# Altium PCB 3043-1-1532.PcbDoc
Units mm, origin at the board's own origin, x right, y up, seen from the top; angles counter-clockwise.
Board outline 82.5 x 82.18 mm, 2 copper layers (Top Layer, Bottom Layer); 98 components, 93 nets, 361 pads, 128 vias.
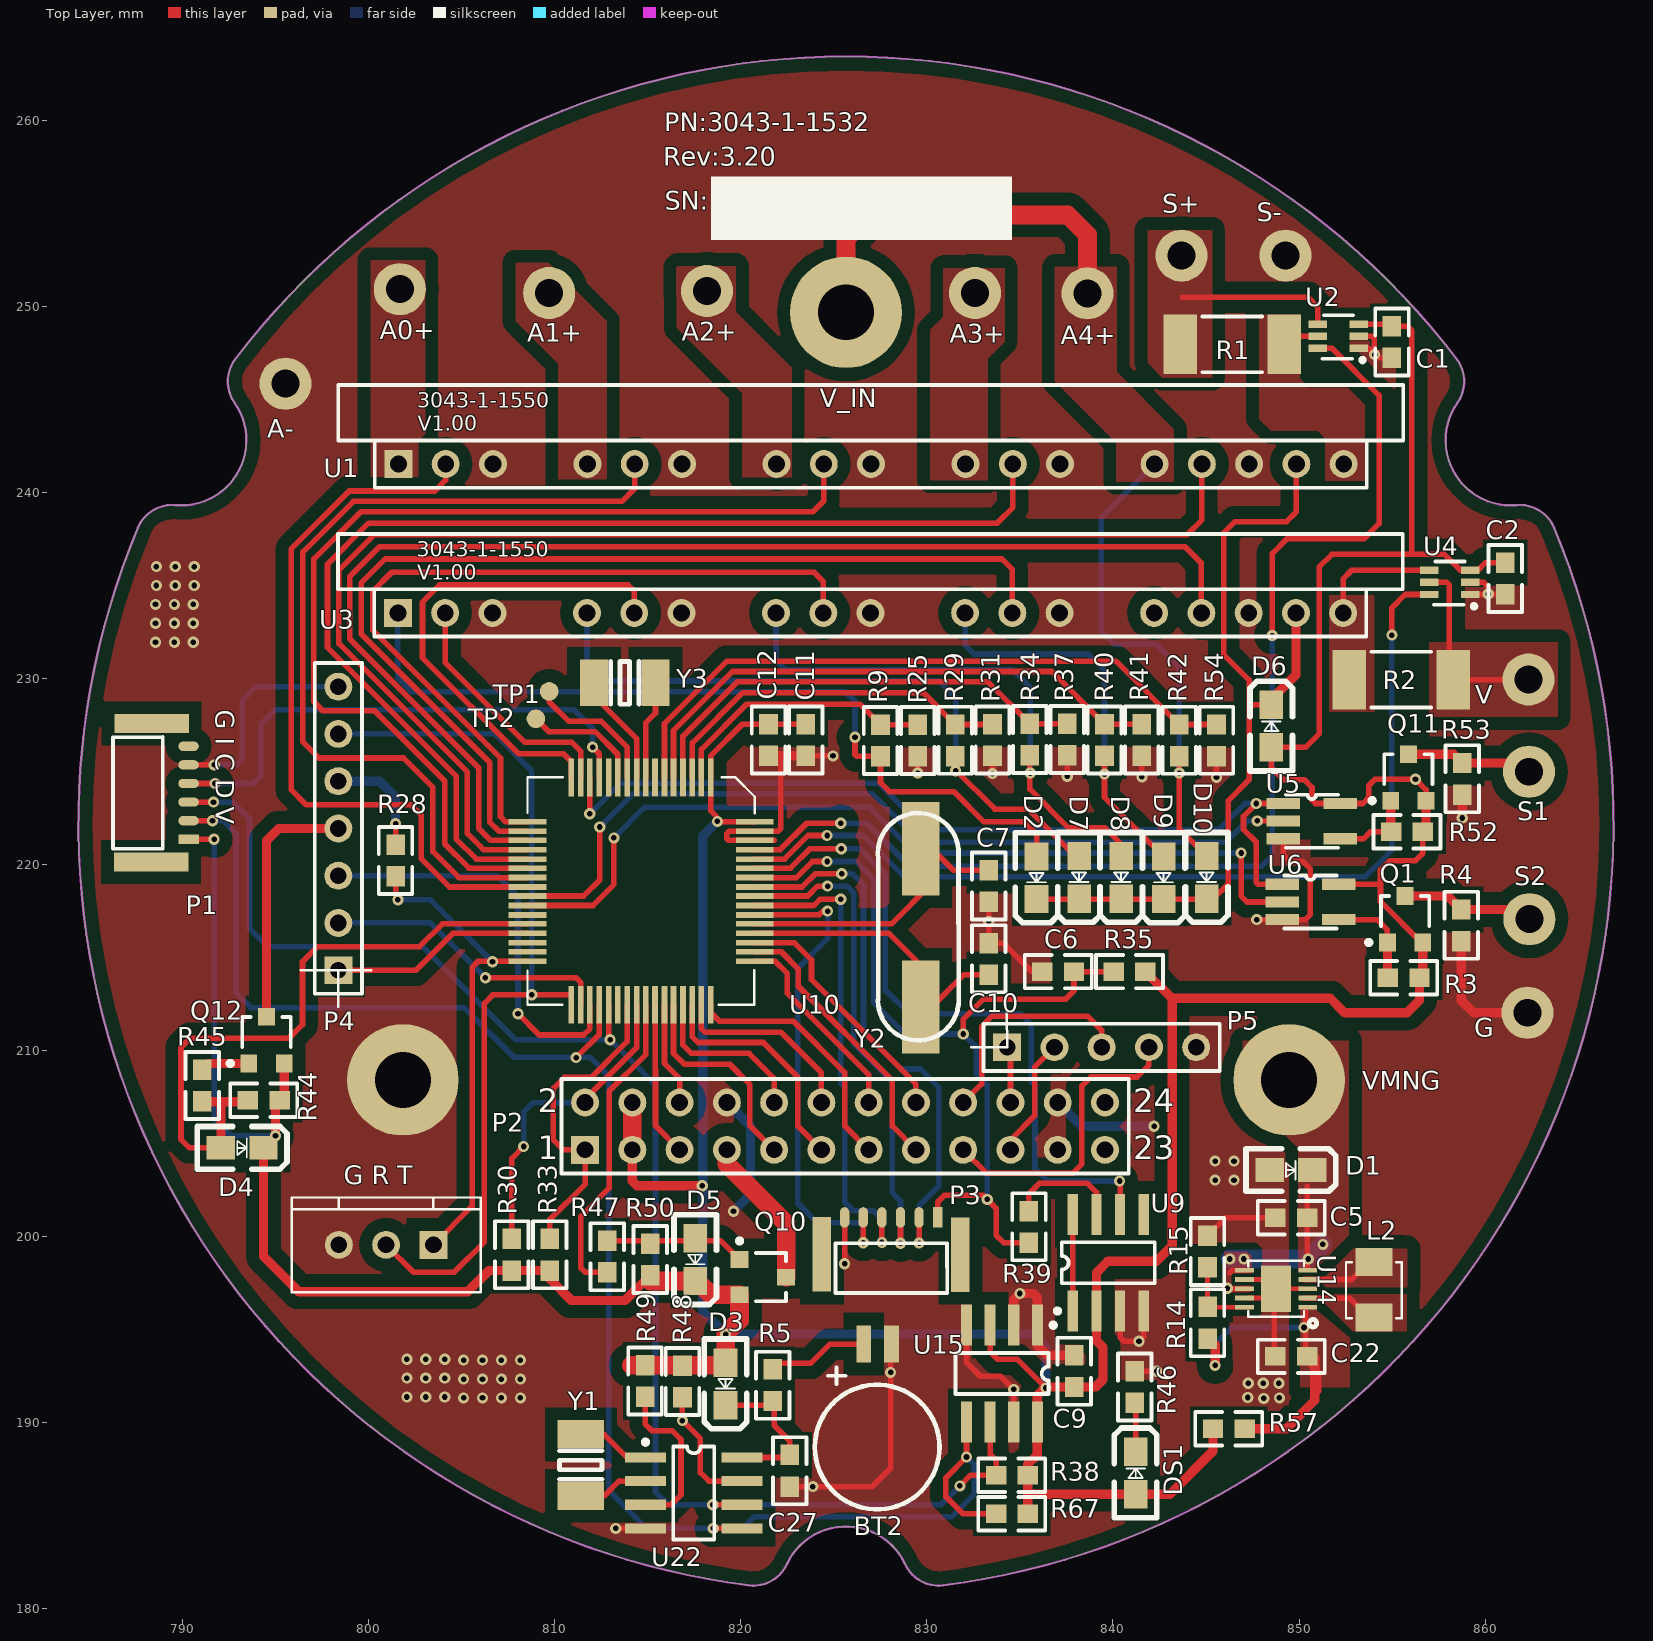
[diagram p0: Top Layer view]
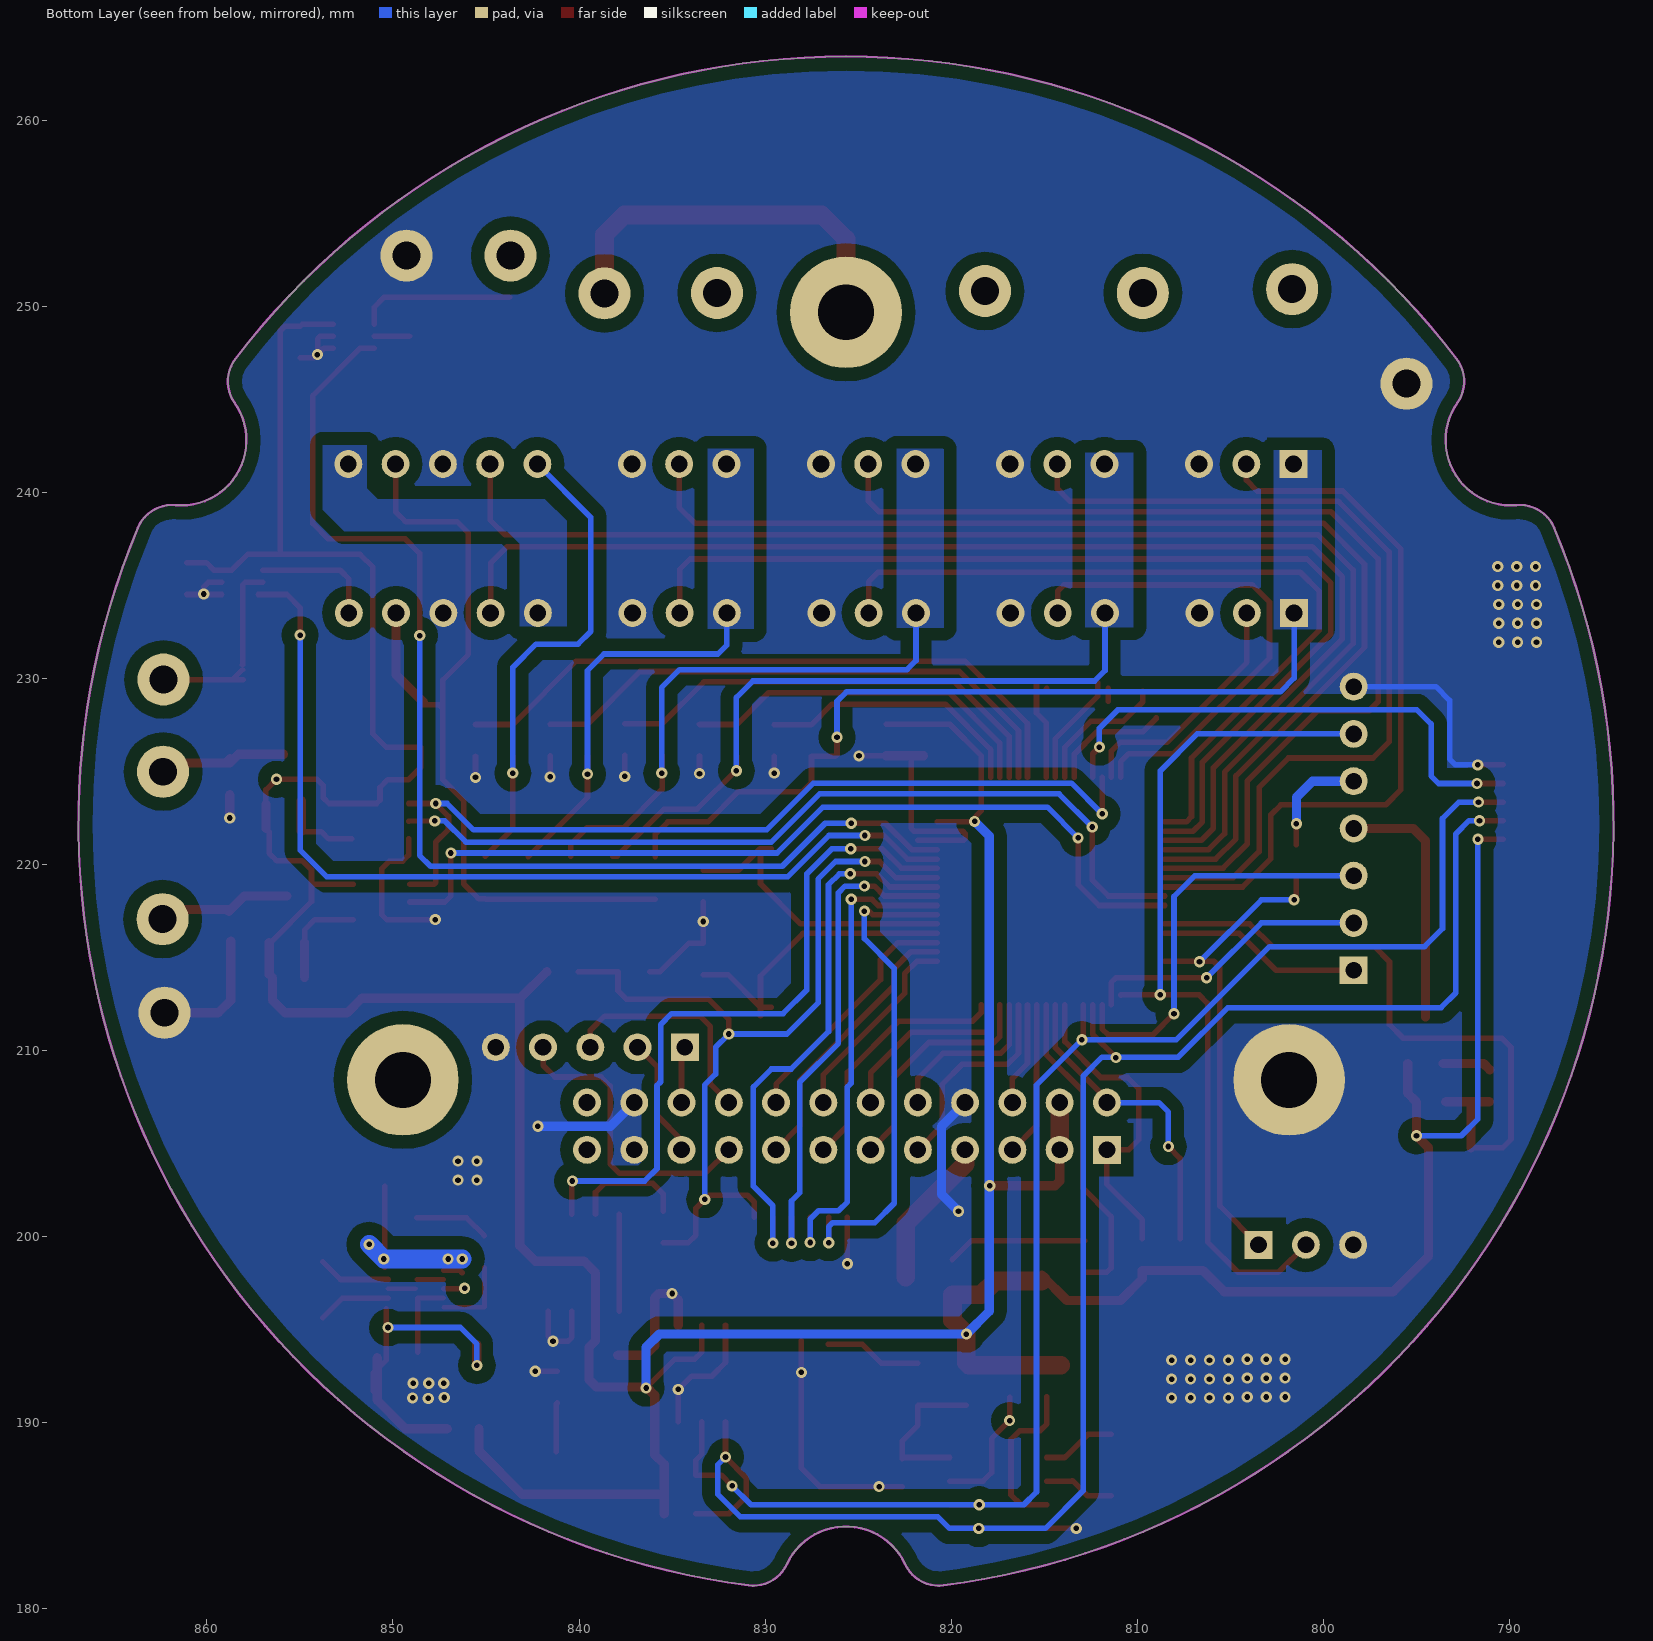
[diagram p1: Bottom Layer view, seen from below]

## Layer stack, top to bottom
Top Layer: signal copper 0.0356
Dielectric: core 0.32, FR-4, Dk 4.8
Bottom Layer: signal copper 0.0356

## Board outline
787.598,238.1 cw(c789.443,237.328) 789.62,239.32 ccw(c789.93,242.806) 792.794,244.818 cw(c794.431,245.967) 792.84,247.179 cw(c825.653,222.181) 858.466,247.179 cw(c856.875,245.967) 858.512,244.818 ccw(c861.377,242.806) 861.686,239.32 cw(c861.863,237.328) 863.708,238.1 cw(c825.653,222.181) 830.895,181.266 cw(c830.641,183.25) 828.827,182.407 ccw(c825.653,180.931) 822.479,182.407 cw(c820.666,183.25) 820.411,181.266 cw(c825.653,222.181)

## Design rules (kind name [scope] priority, off if disabled: settings)
Clearance [All] p1: gap=0.1
ComponentClearance [All] p1: gap=0 collisioncheckmode=2
HoleSize [All] p1: absolutevalues=TRUE maxlimit=10 minlimit=0.025 maxpercent=80.000 minpercent=20.000
PolygonConnect [All] p1: connectstyle=Direct reliefconductorwidth=0.254 reliefentries=4 polygonreliefangle="90 Angle"
RoutingVias [All] p1: holewidth=0.711 width=1.27 viastyle="Through Hole" minholewidth=0.711 minwidth=1.27 maxholewidth=0.711 maxwidth=1.27
SolderMaskExpansion [All] p1: expansion=0.102
TestPointUsage [All] p1: valid=0 allowmultiple=FALSE
Testpoint [All] p1: side=15 testpointundercomponent=TRUE minsize=1.016 maxsize=2.54 preferedsize=1.524 minholesize=0 maxholesize=1.016 preferedholesize=0.813 testpointgrid=0.025 style=1023 order=1234567890
Width [All] p1: maxlimit=10 minlimit=0.1 preferedwidth=0.254 toplayer_prefwidth=0.5 bottomlayer_prefwidth=0.3 minimp=50.000000 maximp=50.000000 favimp=50.000000
16 further rules are at their usual default settings.

## Classes and differential pairs
component class U_7-GPS&GPRS: D4 P4 Q12 R28 R44 R45
component class U_5-ADC: R9 R25 R29 R31 R34 R37 R40 R41 R42 R54
component class U_4-LuxSensor: JP13 MARK1 MARK2 NET P1 PWR Ref1 VR1 VR2
component class U_3-MCU: BT3 BT4 BT5 BT6 BT7 BT8 C6 C7 C10 C11 C12 CN1 CN2 CP1 CP2 CP3 CP4 CP5 CP6 CP7 CP8 D5 DBG G "G R T" JP2 JP3 P2 P3 P5 Q1 Q10 Q11 R3 R4 R30 R33 R35 R39 R47 R50 R52 R53 RA3 RA4 S1 S2 S3 S4 S5 S6 S7 S8 TP1 TP2 TP3 TP7 TP13 TP14 TP15 TP16 TP17 TP18 U5 U6 u7 U9 U10 U29 U30 U31 U57 U58 U59 U60 U61 U62 V Y2 Y3
component class U_1-Power: 5V -5V BAT C5 C22 D1 D6 DS1 J1 J2 J3 J4 L2 NC R14 R15 R46 R57 R58 R94 R95 R96 R97 R98 R99 R100 R101 R102 TP11 U14 U32 U63 U64 U65 U66 U67 U68 U69 VIN VMNG VOUT
component class U_2-Charge&Discharge: A0+ A1+ A2+ A3+ A4+ A- C1 C2 D2 D7 D8 D9 D10 GND Q2 Q3 Q4 Q5 Q6 Q7 Q8 Q9 R1 R2 R6 R7 R10 R11 R12 R13 R16 R17 R18 R19 R20 R21 R22 R23 R27 R32 R36 R70 R71 R72 R73 R74 R75 R76 R77 R78 R87 R88 R89 R90 R91 R92 R93 S+ S- SEN U1 U2 U3 U4 U7 U8 U11 V_IN
component class U_6-E2p&RTC: BT2 C9 C27 D3 DS3 L1 L3 R5 R38 R48 R49 R67 TP4 TP5 U15 U22 Y1

## Components (designator, comment, footprint, x,y, rotation, side; value= is the part's Value field where it differs from the comment)
A0+ "ND" END_1.5_2.8 801.675,250.927 r0 top
A1+ "ND" END_1.5_2.8 809.701,250.723 r0 top
A2+ "ND" END_1.5_2.8 818.185,250.825 r0 top
A3+ "ND" END_1.5_2.8 832.587,250.723 r0 top
A4+ "ND" END_1.5_2.8 838.632,250.698 r0 top
A- "ND" END_1.5_2.8 795.528,245.847 r0 top
BT2 "MS621FE" BATT_BAK 827.278,188.087 r90 top
C1 "100nF_20%_0603" C1608-0603 854.989,248.082 r90 top
C2 "100nF_20%_0603" C1608-0603 861.085,235.382 r90 top
C5 "10uF_20%_0603" C1608-0603 849.581,201.017 r180 top
C6 "100nF_20%_0603" C1608-0603 837.057,214.249 r180 top
C7 "22pF_20%_0603" C1608-0603 833.323,218.846 r90 top
C9 "100nF_20%_0603" C1608-0603 837.921,192.776 r90 top
C10 "22pF_20%_0603" C1608-0603 833.323,214.935 r270 top
C11 "100nF_20%_0603" C1608-0603 823.493,226.695 r270 top
C12 "100nF_20%_0603" C1608-0603 821.487,226.695 r270 top
C22 "4.7uF_20%_0603" C1608-0603 849.579,193.573 r180 top
C27 "Cap2" C1608-0603 822.63,187.427 r270 top
D1 "5.1V" LED0805 849.681,203.581 r180 top (schematic designator D?)
D2 "SS14" LED0805 835.889,219.177 r90 top
D3 "SS14" LED0805 819.175,191.973 r90 top
D4 "5.1V" LED0805 793.318,204.775 r180 top
D5 "5.1V" LED0805 817.55,198.653 r90 top
D6 "SS14" LED0805 848.512,227.559 r270 top
D7 "SS14" LED0805 838.175,219.202 r90 top
D8 "SS14" LED0805 840.435,219.202 r90 top
D9 "SS14" LED0805 842.721,219.177 r90 top
D10 "SS14" LED0805 845.033,219.202 r90 top
DS1 "LED" LED0805 841.223,187.427 r270 top
G "ND" END_1.5_2.8 862.279,212.039 r90 top
"G R T" "Header 3" XH-03H 803.478,199.568 r180 top (schematic designator "T R G")
L2 "Inductor" L3x3x1.5_5A 855.523,198.653 r270 top
P1 "Header 5H" SH-06S 790.296,221.386 r90 top
P2 "Header 12X2" HDR2X12 811.632,204.673 r0 top locked
P3 "Header 6" SH-06S 830.555,201.016 r180 top
P4 "Header 7" HDR1X7 798.37,214.325 r90 top
P5 "Header 5" HDR1X5 834.314,210.185 r0 top
Q1 "MOSFET-P_SI3401_2301" SO-G3/C2.5 855.751,217.983 r0 top
Q10 "MOSFET-P_SI3401_2301" SO-G3/C2.5 822.096,197.777 r270 top
Q11 "MOSFET-P_SI3401_2301" SO-G3/C2.5 855.929,225.603 r0 top
Q12 "MOSFET-P_SI3401_2301" SO-G3/C2.5 794.563,211.48 r0 top
R1 "25mR_1%_3225" CR6332-2512 846.404,247.955 r0 top
R2 "25mR_1%_3225" CR6332-2512 855.497,229.946 r180 top
R3 "51K_5%_0603" C1608-0603 855.624,213.919 r0 top
R4 "100K_5%_0603" C1608-0603 858.723,216.738 r270 top
R5 "180R_5%_0603" C1608-0603 821.715,192.024 r90 top
R9 "1K_5%_0603" C1608-0603 827.507,226.67 r90 top
R14 "1000K_1%_0603" C1608-0603 845.085,195.378 r90 top
R15 "200K_1%_0603" C1608-0603 845.083,199.212 r90 top
R25 "1K_5%_0603" C1608-0603 829.513,226.67 r90 top
R28 "0R _1%_0603" C1608-0603 801.446,220.218 r270 top
R29 "1K_5%_0603" C1608-0603 831.52,226.681 r90 top
R30 "100K _5%_0603" C1608-0603 807.695,199.034 r90 top
R31 "1K_5%_0603" C1608-0603 833.526,226.695 r90 top
R33 "100K _5%_0603" C1608-0603 809.727,199.034 r90 top
R34 "1K_5%_0603" C1608-0603 835.533,226.72 r90 top
R35 "10K _5%_0603" C1608-0603 840.892,214.249 r0 top
R37 "1K_5%_0603" C1608-0603 837.54,226.72 r90 top
R38 "100K_5%_0603" C1608-0603 834.568,187.188 r0 top
R39 "0R _5%_0603" C1608-0603 835.482,200.533 r270 top
R40 "1K_5%_0603" C1608-0603 839.546,226.695 r90 top
R41 "1K_5%_0603" C1608-0603 841.553,226.695 r90 top
R42 "1K_5%_0603" C1608-0603 843.559,226.681 r90 top
R44 "51K_5%_0603" C1608-0603 794.36,207.34 r0 top
R45 "1K_5%_0603" C1608-0603 791.058,208.128 r270 top
R46 "1K_5%_0603" C1608-0603 841.172,191.922 r270 top
R47 "1K_5%_0603" C1608-0603 812.825,198.933 r90 top
R48 "51K_5%_0603" C1608-0603 816.864,192.227 r270 top
R49 "51K_5%_0603" C1608-0603 814.857,192.253 r270 top
R50 "51K_5%_0603" C1608-0603 815.137,198.78 r270 top
R52 "51K_5%_0603" C1608-0603 855.802,221.767 r0 top
R53 "100K_5%_0603" C1608-0603 858.774,224.612 r270 top
R54 "1K_5%_0603" C1608-0603 845.566,226.681 r90 top
R57 "0R_1%_0603" C1608-0603 846.226,189.687 r180 top
R67 "100K_5%_0603" C1608-0603 834.568,185.115 r0 top
S1 "ND" END_1.5_2.8 862.355,224.993 r90 top
S2 "ND" END_1.5_2.8 862.381,217.068 r0 top
S+ "ND" END_1.5_2.8 843.686,252.73 r0 top
S- "ND" END_1.5_2.8 849.274,252.73 r0 top
TP1 "TP" TP_1MM 809.701,229.311 r90 top
TP2 "TP" TP_1MM 808.99,227.838 r90 top
U1 "3043-1-1550" 3043-1-1550V1.00 824.433,239.014 r0 top
U2 "INA213" SC70-6 853.211,247.752 r180 top
U3 "3043-1-1550" 3043-1-1550V1.00 824.408,231.013 r0 top
U4 "INA213" SC70-6 859.206,234.518 r180 top
U5 "74LVC1G08" SOT23-5 850.824,221.132 r0 top
U6 "74LVC1G08" SOT23-5 850.748,216.789 r0 top
U9 "MAX706S" SO-8 839.749,198.603 r0 top
U10 "MSP430F149/249/449" QFP-64 820.725,212.446 r180 top
U14 "TPS63000" QFN-10 850.266,198.706 r180 top
U15 "24LC128" 8s1 834.034,192.649 r180 top
U22 "DS1337S" SO-8 817.474,186.233 r270 top
V "ND" END_1.5_2.8 862.33,229.946 r90 top
V_IN "ND" END_3_6#1 826.999,255.905 r90 top
VMNG "ND" END_3_6#2 852.322,210.795 r90 top locked (schematic designator VMNG_OUT)
Y1 "32.768kHz_SMD" XTAL-3216 811.403,186.08 r90 top
Y2 "8MHz_SMD" XTAL-P4mm_SMD 828.904,215.138 r90 top
Y3 "32.768kHz_SMD" XTAL-3216 815.416,229.768 r180 top

## Footprints (in the part's own frame and the unit in brackets; to place one, negate y for a bottom-side part, rotate by r counter-clockwise, add the part's x,y. Pads: shape width x height; smd on the part's side, far side on the other; paste and mask are expansions set on the pad)
8s1 [mm] "Small Outline; 8 Leads; Body Width 3.9 mm; Pitch 1.27 mm"
  rect 0.6x2.2 smd: 1(-1.905,-2.6) 2(-0.635,-2.6) 3(0.635,-2.6) 4(1.905,-2.6) 5(1.905,2.6) 6(0.635,2.6) 7(-0.635,2.6) 8(-1.905,2.6)
  silkscreen extent -2.88,-2.72 2.5,1.1
3043-1-1550V1.00 [mm]
  rect 1.5x1.5 hole 0.9: 1(-22.835,2.515)
  round 1.5 hole 0.9: 2(-20.295,2.515) 3(-17.755,2.515) 5(-12.675,2.515) 6(-10.135,2.515) 7(-7.595,2.515) 9(-2.515,2.515) 10(0.025,2.515) 11(2.565,2.515) 13(7.645,2.515) 14(10.185,2.515) 15(12.725,2.515) 17(17.805,2.515) 18(20.345,2.515) 19(22.885,2.515) 20(25.425,2.515) 21(27.965,2.515)
  silkscreen extent -26.06,1.24 31.17,6.76
BATT_BAK [mm]
  rect 2x0.8 smd: 1(6.147,0.668) 2(6.147,-0.821)
  silkscreen extent -2.74,-3.4 4.9,3.3
C1608-0603 [mm] "Chip Resistor; Body 1.6 x 0.8 mm (LxW typ)"
  rect 1.1x1 smd: 1(-0.85,0) 2(0.85,0)
  silkscreen extent -1.8,-0.9 1.8,0.9
CR6332-2512 [mm] "Chip Resistor; Body 6.3 x 3.2 mm (LxW typ)"
  rect 1.8x3.2 smd: 1(-2.8,0) 2(2.8,0)
  silkscreen extent -1.6,-1.5 1.6,1.5
END_1.5_2.8 [mm]
  round 2.8 hole 1.5: 1(0,0)
END_3_6#1 [mm]
  round 6 hole 3: 1(-6.224,1.345)
END_3_6#2 [mm]
  round 6 hole 3: 1(-2.363,2.854)
HDR1X5 [mm] "Connector; Header; 5 Position"
  rect 1.5x1.5 hole 0.9: 1(0,0)
  round 1.5 hole 0.9: 2(2.54,0) 3(5.08,0) 4(7.62,0) 5(10.16,0)
  silkscreen extent -1.27,-1.27 11.43,1.27
HDR1X7 [mm] "Connector; Header; 7 Position"
  rect 1.5x1.5 hole 0.9: 1(0,0)
  round 1.5 hole 0.9: 2(2.54,0) 3(5.08,0) 4(7.62,0) 5(10.16,0) 6(12.7,0) 7(15.24,0)
  silkscreen extent -1.27,-1.27 16.51,1.27
HDR2X12 [mm] "Connector; Header; 12x2 Position"
  rect 1.5x1.5 hole 0.9: 1(0,0)
  round 1.5 hole 0.9: 2(0,2.54) 3(2.54,0) 4(2.54,2.54) 5(5.08,0) 6(5.08,2.54) 7(7.62,0) 8(7.62,2.54) 9(10.16,0) 10(10.16,2.54) 11(12.7,0) 12(12.7,2.54) 13(15.24,0) 14(15.24,2.54) 15(17.78,0) 16(17.78,2.54) 17(20.32,0) 18(20.32,2.54) 19(22.86,0) 20(22.86,2.54) 21(25.4,0) 22(25.4,2.54) 23(27.94,0) 24(27.94,2.54)
  silkscreen extent -1.27,-1.27 29.21,3.81
L3x3x1.5_5A [mm]
  rect 1.5x2 smd: 1(0,-1.5) 2(3,-1.5)
  silkscreen extent 0.03,-3 3.03,0
LED0805 [mil]
  rect 60x50 smd: 1(49.55,-0.2) 2(-40.45,-0.2)
  silkscreen extent -90,-45 100,45
QFN-10 [mm]
  rect 1.6x2.5 smd: 0(1.5,1.5)
  rect 1x0.25 smd: 1(-0.2,2.5) 2(-0.2,2) 3(-0.2,1.5) 4(-0.2,1) 5(-0.2,0.5) 6(3.2,0.5) 7(3.2,1) 8(3.2,1.5) 9(3.2,2) 10(3.2,2.5)
  silkscreen extent -0.68,0 3,3.55
QFP-64 [mil]
  rect 12x80 smd: 1(92,-482) 2(112,-482) 3(131,-482) 4(151,-482) 5(171,-482) 6(190,-482) 7(210,-482) 8(230,-482) 9(249,-482) 10(269,-482) 11(289,-482) 12(308,-482) 13(328,-482) 14(348,-482) 15(367,-482) 16(387,-482) 33(387,-1) 34(367,-1) 35(348,-1) 36(328,-1) 37(308,-1) 38(289,-1) 39(269,-1) 40(249,-1) 41(230,-1) 42(210,-1) 43(190,-1) 44(171,-1) 45(151,-1) 46(131,-1) 47(112,-1) 48(92,-1)
  rect 80x12 smd: 17(480,-388) 18(480,-368) 19(480,-349) 20(480,-329) 21(480,-309) 22(480,-290) 23(480,-270) 24(480,-250) 25(480,-231) 26(480,-211) 27(480,-191) 28(480,-172) 29(480,-152) 30(480,-132) 31(480,-113) 32(480,-93) 49(-1,-93) 50(-1,-113) 51(-1,-132) 52(-1,-152) 53(-1,-172) 54(-1,-191) 55(-1,-211) 56(-1,-231) 57(-1,-250) 58(-1,-270) 59(-1,-290) 60(-1,-309) 61(-1,-329) 62(-1,-349) 63(-1,-368) 64(-1,-388)
  silkscreen extent -1,-482 480,-1
SC70-6 [mm]
  rect 1x0.4 smd: 1(0,0) 2(0,-0.65) 3(0,-1.3) 4(2.2,-1.3) 5(2.2,-0.65) 6(2.2,0)
  silkscreen extent -0.3,-1.78 1.96,0.73
SH-06S [mm]
  rect 1x4 smd: 0(-1.245,1.981) 0(6.198,1.956)
  rect 0.5x1.1 smd: 1(-0.025,-0.025)
  oval 0.5x1.1 smd: 2(0.975,-0.025) 3(1.975,-0.025) 4(2.975,-0.025) 5(3.975,-0.025) 6(4.975,-0.025)
  silkscreen extent -0.53,1.36 5.47,4.04
SO-8 [mm] "Plastic Small Outline; 8 Leads; Body Width 3.9 mm"
  rect 0.55x2.2 smd: 1(-1.905,-2.6) 2(-0.635,-2.6) 3(0.635,-2.6) 4(1.905,-2.6) 5(1.905,2.6) 6(0.635,2.6) 7(-0.635,2.6) 8(-1.905,2.6)
  silkscreen extent -2.85,-2.72 2.5,1.1
SO-G3/C2.5 [mm] "SOT-23; 3 Leads; Body 3.0 x 2.6 mm, inc. leads (LxW max)"
  rect 0.9x0.95 smd: 1(-1.001,-2.164) 2(0.899,-2.164) 3(-0.051,0.336)
  silkscreen extent -2.13,-2.29 1.25,0.34
SOT23-5 [mm]
  rect 1.8x0.6 smd: 1(-1.662,2.154) 2(-1.662,1.204) 3(-1.662,0.254) 4(1.386,0.254) 5(1.386,2.154)
  silkscreen extent -1.54,-0.22 1.26,2.63
TP_1MM [mm]
  round 1 smd: 1(0,0)
XH-03H [mm] "XH Serial,2.54mm pitch"
  rect 1.5x1.5 hole 0.9: 1(0,0)
  round 1.5 hole 0.9: 2(2.54,0) 3(5.08,0)
  silkscreen extent -2.54,-2.54 7.62,2.54
XTAL-3216 [mil] "XTAL SMD type, body=1.5x3.2mm"
  rect 60x98.43 smd: 1(0,0) 2(130,0)
  silkscreen extent 35,-45 95,45
XTAL-P4mm_SMD [mm] "XTAL,Pitch 4mm,SMD"
  rect 5x2 smd: 1(-2.794,-0.762) 2(5.715,-0.762)
  silkscreen extent -4.58,-2.81 7.63,1.54

## Part data
BT2: library part Battery, "Multicell Battery"
C1 C2 C5 C6 C7 C9 C10 C11 C12 C22: library part Cap2, "Capacitor"
C27: "Capacitor"
D1 D3: library part "D Tunnel1", "Tunnel Diode - RLC Model"
D2 D4 D5 D6 D7 D8 D9 D10: library part "D Schottky", "Schottky Diode"
"G R T": "Header, 3-Pin"
P1: library part "Header 4", "Header, 4-Pin"
P2: library part "Header 10X2", "Header, 10-Pin, Dual row"
P3: library part "Header 3X2", "Header, 3-Pin, Dual row"
P4: library part "Header 6", "Header, 6-Pin"
P5: "Header, 5-Pin"
Q1 Q10 Q11 Q12: library part MOSFET-P
R1 R2 R3 R4 R5 R9 R14 R15 R25 R28 R29 R30 R31 R33 R34 R35 R37 R38 R39 R40 R41 R42 R44 R45 R46 R47 R48 R49 R50 R52 R53 R54 R57 R67: library part Res3, "Resistor"
TP1 TP2: library part TP_1mm
U9: library part PCF8574T
U10: library part STC15F2K60S2_QFP44
U14: library part AP2004
U15: library part 24LC02, "IC"
VMNG: library part COAX-F, "Coax-F Connector"
Y1 Y2 Y3: library part XTAL, "Crystal Oscillator"

## Free pads (board coordinates)
  round 6 hole 3: 0(801.837,208.432)

## Via types
v1: diameter 0.6, hole 0.3, Top Layer to Bottom Layer, 128 vias

## Nets (pads, with @x,y where several pads share a name; then routed paths per layer and width w, separated by ;. In a path a pad name is that pad's centre, name@x,y a point inside that pad or via, vN(x,y) a via of type N, cw(c..) or ccw(c..) an arc to the next point about the centre after c; other vN are vias at no path point)
A_VB0: R9.2 R25.2 U10.2 | length 14.6
  Top Layer w0.3: U10.2 817.88,226.187 820.318,228.625 826.401,228.625 R9.2 R25.2
A_VB1: R29.2 R31.2 U10.3 | length 19.8
  Top Layer w0.3: U10.3 817.397,226.543 820.09,229.235 829.816,229.235 R29.2 833.513,227.531 R31.2
A_VB2: R34.2 R37.2 U10.4 | length 25
  Top Layer w0.3: U10.4 816.889,226.898 819.81,229.819 833.284,229.819 R34.2 R37.2
A_VB3: R40.2 R41.2 U10.5 | length 30.2
  Top Layer w0.3: U10.5 816.381,227.203 819.556,230.378 836.713,230.378 R40.2 R41.2
A_VB4: R42.2 R54.2 U10.6 | length 35.4
  Top Layer w0.3: U10.6 815.899,227.584 819.252,230.937 840.154,230.937 R42.2 R54.2
A_VCHG: U2.6 U10.61 | length 63.5
  Top Layer w0.3: U10.61 822.122,220.802 823.544,222.225 v1(825.373,222.225) ; v1(848.563,232.308) 848.563,236.728 849.351,237.515 853.491,237.515 854.304,238.328 854.304,245.212 851.764,247.752 U2.6
  Bottom Layer w0.3: v1(825.373,222.225) 826.77,222.225 829.081,219.913 847.979,219.913 848.563,220.497 v1(848.563,232.308)
A_VDIS: U4.6 U10.60 | length 51.9
  Top Layer w0.3: U10.60 822.35,220.294 823.62,221.564 v1(824.636,221.564) ; v1(854.989,232.334) 854.989,233.807 855.701,234.518 U4.6@857.25,234.518
  Bottom Layer w0.3: v1(824.636,221.564) 826.567,221.564 828.777,219.354 853.567,219.354 854.989,220.777 v1(854.989,232.334)
CHG_0: U1.2 U10.24 | length 39.9
  Top Layer w0.3: U1.2 804.139,240.665 803.554,240.081 798.957,240.081 795.833,236.957 795.833,224.028 796.646,223.215 802.284,223.215 802.818,222.682 802.818,220.32 804.342,218.796 U10.24
CHG_1: U1.6 U10.23 | length 47.9
  Top Layer w0.3: U10.23 804.85,219.304 803.453,220.701 803.453,224.155 801.878,225.73 797.331,225.73 796.468,226.593 796.468,236.804 799.186,239.522 813.613,239.522 814.299,240.208 U1.6
CHG_2: U1.10 U10.22 | length 55.5
  Top Layer w0.3: U10.22 805.383,219.812 804.088,221.107 804.088,224.485 800.303,228.27 797.535,228.27 797.052,228.752 797.052,236.423 799.592,238.963 823.874,238.963 824.459,239.547 U1.10
CHG_3: U1.14 U10.21 | length 62.3
  Top Layer w0.3: U10.21 805.79,220.294 804.697,221.386 804.697,224.765 797.789,231.673 797.789,236.144 799.998,238.354 833.78,238.354 834.619,239.192 U1.14
CHG_4: U1.18 U10.20 | length 71.1
  Top Layer w0.3: U10.20 806.171,220.802 805.307,221.666 805.307,224.968 798.398,231.877 798.398,235.839 800.278,237.719 843.966,237.719 844.779,238.531 U1.18
DCHG_0: U3.2 U10.15 | length 13.3
  Top Layer w0.3: U3.2 804.113,230.861 808.406,226.568 810.92,226.568 811.403,226.085 U10.15
DCHG_1: U3.6 U10.16 | length 27.2
  Top Layer w0.3: U10.16 810.895,225.527 810.463,225.958 808.05,225.958 802.894,231.115 802.894,234.112 803.808,235.026 813.943,235.026 814.273,234.696 U3.6
DCHG_2: U3.10 U10.17 | length 43
  Top Layer w0.3: U10.17 807.364,222.301 807.085,222.58 807.085,225.73 800.227,232.588 800.227,234.696 801.243,235.712 823.925,235.712 824.433,235.204 U3.10
DCHG_3: U3.14 U10.18 | length 56
  Top Layer w0.3: U10.18 807.009,221.793 806.501,222.301 806.501,225.501 799.592,232.41 799.592,235.128 800.887,236.423 834.034,236.423 834.593,235.864 U3.14
DCHG_4: U3.18 U10.19 | length 68.8
  Top Layer w0.3: U10.19 806.552,221.31 805.917,221.945 805.917,225.196 798.982,232.131 798.982,235.483 800.583,237.084 843.864,237.084 844.753,236.195 U3.18
FLASH_CTRL: U5.1 U6.1 U10.14 | length 47.8
  Top Layer w0.3: v1(811.886,222.733) U10.14 ; U6.1 847.806,218.943 847.7,219.05 847.7,221.209 847.014,221.894 847.014,222.596 v1(847.704,223.287) U5.1
  Bottom Layer w0.3: v1(811.886,222.733) 813.537,224.384 827.405,224.384 829.92,221.869 845.668,221.869 847.085,223.287 v1(847.704,223.287)
FLASH_OUT_A: Q11.3 R53.1 S1.1 | length 7.2
  Top Layer w0.5: Q11.3 858.298,225.938 R53.1 861.886,225.462 S1.1 ; R53.1@858.749,225.704 R53.1@858.991,225.462
FLASH_OUT_B: Q1.3 R4.1 S2.1 | length 7.3
  Top Layer w0.5: Q1.3 857.993,218.318 R4.1@858.825,217.487 ; R4.1 861.861,217.588 S2.1
FLS_CS_A: U5.2 U10.25 | length 46.1
  Top Layer w0.3: U10.25 811.555,218.313 812.419,219.177 v1(812.419,222.021) ; v1(847.75,222.352) U5.2
  Bottom Layer w0.3: v1(812.419,222.021) 814.197,223.799 827.075,223.799 829.666,221.209 846.074,221.209 847.217,222.352 v1(847.75,222.352)
FLS_CS_B: U6.2 U10.26 | length 47.7
  Top Layer w0.3: U10.26 812.063,217.805 813.181,218.923 v1(813.181,221.437) ; v1(846.887,220.624) 846.887,218.313 847.206,217.993 U6.2
  Bottom Layer w0.3: v1(813.181,221.437) 814.832,223.088 826.897,223.088 829.361,220.624 v1(846.887,220.624)
GND: "G R T.3" A-.1 BT2.2 C1.1 C2.1 C5.2 C6.2 C7.1 C9.2 C10.1 C11.2 C12.2 C22.2 C27.2 D1.1 G.1 P1.5 P2.8 P2.21 P2.22 P3.6 P4.7 P5.5 pad.0 R4.2 R15.2 R25.1 R31.1 R37.1 R41.1 R46.1 R53.2 R54.1 S-.1 U1.3 U1.7 U1.11 U1.15 U1.19 U2.1 U2.2 U3.3 U3.7 U3.11 U3.15 U3.19 U4.1 U4.2 U5.3 U6.3 U9.3 U9.4 U10.62 U10.63 U14.0 U14.3 U14.7 U14.9 U15.1 U15.2 U15.4 U15.7 U22.4 | length 119.8
  Top Layer w0.25: U14.9@847.266,196.706 U14.0@848.673,196.706 ; U14.7@847.266,197.706 U14.0@848.708,197.706 ; U14.0 U14.3@850.266,197.206
  Top Layer w0.3: P1.5 v1(791.706,225.361) ; v1(813.283,184.328) U22.4 ; 821.792,221.31 819.328,221.31 819.252,221.386 819.252,221.666 819.379,221.793 821.995,221.793 822.147,221.945 822.147,225.794 822.096,225.845 ; C27.2 827.063,186.577 828.048,187.562 BT2.2@828.048,194.404 ; C11.2 v1(824.955,225.845) ; v1(825.58,198.548) P3.6 ; v1(829.513,224.917) R25.1 ; U15.4 832.129,193.243 832.866,192.507 833.958,192.507 v1(834.669,191.795) U15.7 ; C7.1 C10.1 834.099,215.785 835.635,214.249 C6.2 ; v1(833.526,224.892) R31.1 ; v1(837.54,224.739) R37.1 ; U9.3 840.384,194.589 840.588,194.386 v1(841.4,194.386) 841.654,194.64 U9.4 ; R46.1 v1(842.354,192.772) ; v1(841.553,224.714) R41.1 ; R15.2 846.038,201.017 C5.2 ; v1(845.566,224.688) R54.1 ; v1(847.725,217.043) 850.342,217.043 850.595,217.297 850.595,219.786 850.189,220.193 849.478,220.193 849.161,220.509 U5.3 ; C22.2@848.673,193.796 U14.0@848.673,196.706 ; U2.1 853.719,247.752 854.239,247.232 C1.1 ; U2.2 853.908,248.402 854.05,248.26 v1@854.05,247.421 ; U4.1 861.072,234.518 C2.1 ; U4.2 859.927,235.168 860.171,234.925 v1(860.171,234.544)
  Top Layer w0.5: C12.2 C11.2 ; U15.2 834.669,196.621 v1(835,196.952) 835.711,196.952 835.939,196.723 835.939,194.148 836.461,193.626 C9.2 ; R4.2 858.723,212.7 859.384,212.039 G.1 ; v1(858.774,222.504) R53.2
  Bottom Layer w0.3: v1(791.706,225.361) 792.899,225.361 793.217,225.679 793.217,228.829 793.953,229.565 P4.7
  Bottom Layer w0.5: P2.8 820.522,205.943 820.522,202.286 v1(819.607,201.371) ; P2.22 838.305,205.94 842.21,205.94 v1(842.213,205.943)
  other v1: 823.874,186.577 848.106,191.313 805.104,191.338 806.12,191.338 807.136,191.338 808.152,191.338 848.944,191.338 847.242,191.364 802.056,191.389 803.072,191.389 804.088,191.389 847.268,192.126 848.081,192.126 848.919,192.126 805.104,192.354 806.12,192.354 807.136,192.354 808.152,192.354 802.056,192.405 803.072,192.405 804.088,192.405 828.048,192.71 805.104,193.37 806.12,193.37 807.136,193.37 808.152,193.37 802.056,193.421 803.072,193.421 804.088,193.421 845.49,203.048 846.506,203.048 845.49,204.064 846.506,204.064 833.323,216.941 788.543,231.953 789.559,231.953 790.575,231.953 788.543,232.969 789.559,232.969 790.575,232.969 788.543,233.985 789.559,233.985 790.575,233.985 788.594,235.001 789.61,235.001 790.626,235.001 788.594,236.017 789.61,236.017 790.626,236.017 854.059,247.412
GPRS_PWR_EN: P4.1 U10.29 | length 11
  Top Layer w0.3: P4.1 802.538,214.325 804.52,216.306 U10.29
GPS_PWR_EN: D4.1 R44.1 R45.2 U10.28 | length 35.4
  Top Layer w0.3: D4.1 790.367,204.78 789.915,205.232 789.915,210.185 790.397,210.668 795.706,210.668 796.442,211.404 796.442,214.782 797.255,215.595 802.742,215.595 803.961,216.814 U10.28
  Top Layer w0.5: R45.2@791.083,207.252 R44.1@793.422,207.252 ; D4.1 792.06,207.19
IIC0_SCL: P1.3 R38.1 U10.37 U15.6 U22.6 | length 82.5
  Top Layer w0.3: P1.3 v1(791.661,223.361) ; U10.37 812.902,210.82 v1(812.978,210.591) ; v1(818.49,185.598) U22.6 ; v1(831.774,186.614) 832.348,187.188 R38.1 833.718,187.997 833.399,188.316 U15.6@833.399,190.068
  Bottom Layer w0.3: v1(791.661,223.361) 792.715,223.361 793.598,222.479 793.598,216.56 794.563,215.595 802.894,215.595 807.898,210.591 v1(812.978,210.591) 815.416,208.153 815.416,186.284 816.102,185.598 830.758,185.598 v1(831.774,186.614)
IIC0_SDA: P1.2 R67.1 U10.36 U15.5 U22.5 | length 91.4
  Top Layer w0.3: P1.2 v1(791.607,222.361) ; v1(811.149,209.626) 812.394,210.871 U10.36 ; v1(818.515,184.328) U22.5 ; U15.5 v1(832.129,188.163) 831.012,187.046 831.012,186.038 831.935,185.115 R67.1
  Bottom Layer w0.3: v1(791.607,222.361) 792.166,222.361 792.886,221.64 792.886,213.106 793.674,212.319 805.129,212.319 807.796,209.652 811.886,209.652 812.902,208.636 812.902,186.36 814.934,184.328 820.09,184.328 820.725,184.963 831.342,184.963 832.536,186.157 832.536,187.757 v1(832.129,188.163)
LED_CTRL: P2.7 Q10.3 | length 8.2
  Top Layer w1: P2.7 819.252,203.911 822.432,200.731 Q10.3
LED_PWR_EN: R47.1 U10.41 | length 17.1
  Top Layer w0.3: R47.1 811.643,198.083 811.403,198.323 811.403,201.092 812.927,202.616 812.927,207.823 814.883,209.779 U10.41
LUX_INT: P1.4 U10.13 | length 28.2
  Top Layer w0.3: P1.4 v1(791.741,224.361) ; v1(812.038,226.314) 812.394,225.958 U10.13
  Bottom Layer w0.3: v1(791.741,224.361) 793.804,224.361 794.207,224.765 794.207,227.559 794.969,228.321 811.047,228.321 812.038,227.33 v1(812.038,226.314)
MCU_RXD: "G R T.2" P4.6 U10.33 | length 47.5
  Top Layer w0.3: 800.938,199.568 802.411,198.095 804.596,198.095 806.221,199.72 806.221,212.547 806.679,213.004 U10.33@810.87,213.004 ; U10.33@810.876,212.998 U10.33@810.895,212.979
  Bottom Layer w0.3: P4.6 806.78,227.025 808.761,225.044 v1(808.761,213.004)
MCU_RXD2_2: P4.3 U10.35 | length 22.2
  Top Layer w0.3: v1(808.025,211.988) 809.168,210.845 811.555,210.845 811.886,211.176 U10.35
  Bottom Layer w0.3: P4.3 806.907,219.405 808.025,218.288 v1(808.025,211.988)
MCU_TXD: "G R T.1" R28.2 U10.32 | length 26.7
  Top Layer w0.3: R28.2 801.446,218.237 v1(801.573,218.11) ; 803.478,199.568 805.561,201.651 805.561,214.478 805.891,214.808 U10.32
  Bottom Layer w0.3: v1(801.573,218.11) 803.326,218.11 v1(806.653,214.782)
MCU_TXD2_2: P4.2 U10.34 | length 15.6
  Top Layer w0.3: v1(806.272,213.919) 811.149,213.919 811.403,213.665 U10.34
  Bottom Layer w0.3: P4.2 803.326,216.865 v1(806.272,213.919)
NetBT2_1: BT2.1 R5.2 | length 5.2
  Top Layer w0.3: R5.2@821.797,193.206 823.761,193.206 824.789,194.234 BT2.1
NetC7_2: C7.2 U10.53 Y2.2 | length 16
  Top Layer w0.3: U10.53 828.091,216.814 830.25,218.973 Y2.2@830.25,220.396 ; Y2.2 830.275,220.853 831.432,219.696 C7.2
NetC10_2: C10.2 U10.52 Y2.1 | length 17
  Top Layer w0.3: U10.52 827.964,216.306 830.25,214.02 Y2.1@830.25,211.887 ; Y2.1 830.262,212.344 832.002,214.085 C10.2
NetC27_1: C27.1 D3.2 R5.1 U22.8 | length 8.3
  Top Layer w0.3: D3.2 R5.1@821.771,190.946 ; U22.8 C27.1@822.565,188.138 ; R5.1@821.797,190.92 821.797,189.86 822.63,189.027 C27.1@822.63,188.073
NetD5_1: D5.1 Q10.1 R47.2 R50.1 | length 7.5
  Top Layer w0.3: R47.2 818.927,199.783 Q10.1
NetDS1_2: DS1.2 R46.2 | length 2.6
  Top Layer w0.3: R46.2 841.217,191.027 DS1.2
NetL2_1: L2.1 U14.4 | length 3.9
  Top Layer w0.3: U14.4@850.266,197.706 852.821,197.706 L2.1@853.77,198.655
NetL2_2: L2.2 U14.2 | length 3.9
  Top Layer w0.3: U14.2@850.266,196.706 852.719,196.706 L2.2@853.77,195.655
NetP4_5: P4.5 R28.1 | length 6
  Top Layer w0.3: R28.1 v1(801.446,222.199)
  Bottom Layer w0.5: P4.5 800.583,224.485 801.446,223.622 v1(801.446,222.199)
NetQ1_1: Q1.1 R3.1 U6.4 | length 5.4
  Top Layer w0.3: U6.4 854.202,217.043 854.751,216.494 Q1.1
  Top Layer w0.5: R3.1@854.751,213.943 Q1.1
NetQ11_1: Q11.1 R52.1 U5.4 | length 4.5
  Top Layer w0.3: U5.4 853.466,221.387 853.846,221.767 R52.1
  Top Layer w0.5: R52.1@854.928,221.791 Q11.1
NetQ12_1: Q12.1 R45.1 | length 2.6
  Top Layer w0.5: R45.1 791.396,209.316 Q12.1
NetR14_2: R14.2 R15.1 U14.10 | length 4.3
  Top Layer w0.25: R14.2@845.083,196.23 R15.1 ; R14.2 845.107,196.206 U14.10@847.266,196.206
NetR39_1: R39.1 U9.7 | length 6.2
  Top Layer w0.3: R39.1 835.482,202.311 836.041,202.87 838.632,202.87 839.114,202.387 U9.7
NetR49_2: R49.2 U22.3 | length 8.8
  Top Layer w0.3: R49.2 814.857,189.941 815.213,189.586 816.305,189.586 816.788,189.103 816.788,186.131 816.254,185.598 U22.3
NetTP1_1: TP1.1 U10.10 | length 7.4
  Top Layer w0.3: TP1.1 809.701,228.752 810.743,227.711 812.495,227.711 813.892,226.314 U10.10
NetTP2_1: TP2.1 U10.11 | length 6.5
  Top Layer w0.3: TP2.1@808.99,227.889 TP2.1 809.676,227.152 812.165,227.152 813.384,225.933 U10.11
NetU9_1: U9.1 U9.8 | length 5.2
  Top Layer w0.3: U9.1 U9.8
NetU10_8: U10.8 Y3.1 | length 5.3
  Top Layer w0.3: Y3.1@814.857,229.464 Y3.1@814.883,229.438 ; U10.8 814.883,227.609 815.416,228.143 Y3.1
NetU10_9: U10.9 Y3.2 | length 6.7
  Top Layer w0.3: Y3.2@811.555,228.778 Y3.2@811.555,229.464 ; Y3.2 812.114,229.057 814.4,226.771 U10.9
NetU22_1: U22.1 Y1.2 | length 3.9
  Top Layer w0.3: Y1.2 812.648,189.382 U22.1@813.867,188.163 ; U22.1@813.918,188.138 U22.1
NetU22_2: U22.2 Y1.1 | length 3.8
  Top Layer w0.3: Y1.1 812.673,186.08 813.486,186.893 ; 813.537,186.868 U22.2
NRST: C6.1 P3.1 R35.1 R39.2 U10.58 | length 47
  Top Layer w0.3: U10.58 822.985,219.304 823.849,220.167 v1(824.636,220.167) ; P3.1 830.58,201.854 830.961,202.235 833.018,202.235 833.73,201.524 833.73,200.076 834.122,199.683 R39.2 ; v1(831.952,210.896) 831.952,211.684 833.044,212.776 837.463,212.776 837.907,213.219 C6.1 R35.1
  Bottom Layer w0.3: v1(824.636,220.167) 826.211,220.167 827.151,219.227 827.151,212.573 828.827,210.896 v1(831.952,210.896) 832.663,210.185 832.663,208.737 833.247,208.153 v1(833.247,202.006)
RHYTHM_CS0: P2.9 U10.44 | length 11.5
  Top Layer w0.3: U10.44 816.381,209.855 816.966,209.271 819.404,209.271 820.471,208.204 820.471,205.994 P2.9
RHYTHM_CS1: P2.10 U10.45 | length 9.1
  Top Layer w0.3: U10.45 816.889,210.312 817.347,209.855 820.445,209.855 821.792,208.509 P2.10
RHYTHM_CS2: P2.11 U10.46 | length 12.7
  Top Layer w0.3: U10.46 817.397,210.744 817.702,210.439 821.207,210.439 823.062,208.585 823.062,205.943 P2.11
RHYTHM_CS3: P2.12 U10.47 | length 10.3
  Top Layer w0.3: U10.47 817.88,211.176 818.058,210.998 822.147,210.998 824.332,208.813 P2.12
RHYTHM_CS4: P2.13 U10.48 | length 13.6
  Top Layer w0.3: U10.48 818.388,212.039 818.845,211.582 822.833,211.582 825.576,208.839 825.576,205.969 P2.13
RHYTHM_CS5: P2.14 U10.49 | length 10.8
  Top Layer w0.3: U10.49 821.842,214.808 822.503,214.147 822.503,213.081 826.872,208.712 P2.14
RHYTHM_CS6: P2.15 U10.50 | length 15.1
  Top Layer w0.3: U10.50 822.173,215.316 823.087,214.401 823.087,213.462 828.142,208.407 828.142,205.943 P2.15
RHYTHM_CS7: P2.16 U10.51 | length 13.4
  Top Layer w0.3: U10.51 822.884,215.798 823.798,214.884 823.798,213.817 829.412,208.204 P2.16
SIM_CLK: P2.17 P5.4 | length 16.7
  Top Layer w0.3: P2.17@832.333,204.673 P2.17 833.222,203.403 837.819,203.403 838.327,203.911 838.327,208.102 838.81,208.585 841.299,208.585 841.934,209.22 P5.4
SIM_IO: P2.18 P5.3 | length 13
  Top Layer w0.3: P2.18@831.952,207.823 P2.18 832.942,208.204 832.942,211.303 833.501,211.861 838.632,211.861 839.394,211.099 P5.3
SIM_RST: P2.20 P5.1 | length 3.6
  Top Layer w0.3: P5.1 834.492,210.007 P2.20 P2.20@835,207.213
SIM_VCC: P2.19 P5.2 | length 6.5
  Top Layer w0.3: P2.19 834.492,205.207 835.787,206.502 835.787,209.118 P5.2
SQW_OUT: R48.2 U22.7 | length 6.9
  Top Layer w0.3: R48.2 v1(816.864,190.119) 817.829,189.154 817.829,187.325 818.286,186.868 U22.7
SW0: P2.5 U10.42 | length 8.3
  Top Layer w0.3: U10.42 815.391,208.991 815.416,208.966 815.416,205.969 P2.5
SW1: P2.6 U10.43 | length 5.6
  Top Layer w0.3: U10.43 815.899,209.321 816.712,208.509 P2.6
SW2: P2.1 R33.2 U10.39 | length 17.3
  Top Layer w0.3: R33.2 809.727,200.914 811.632,202.819 P2.1 810.463,204.673 809.93,205.207 809.93,207.975 810.514,208.559 811.962,208.559 813.892,210.49 U10.39
SW3: P2.2 R30.2 U10.40 | length 17
  Top Layer w0.3: R30.2 807.695,204.216 v1(808.33,204.851) ; P2.2 811.632,207.391 814.4,210.16 U10.40
  Bottom Layer w0.3: v1(808.33,204.851) 808.33,206.705 808.838,207.213 P2.2
TCK: P3.2 U10.57 | length 29.8
  Top Layer w0.3: U10.57 823.29,218.796 824.001,219.507 v1(825.424,219.507) ; v1(829.58,199.66) P3.2
  Bottom Layer w0.3: v1(825.424,219.507) 826.008,219.507 826.592,218.923 826.592,211.023 828.599,209.017 829.666,209.017 830.631,208.051 830.631,202.717 829.58,201.667 v1(829.58,199.66)
TDI: P3.4 U10.55 | length 26.1
  Top Layer w0.3: U10.55 823.925,217.805 824.255,218.135 v1(825.373,218.135) ; v1(827.58,199.692) P3.4
  Bottom Layer w0.3: v1(825.373,218.135) 825.373,208.255 825.576,208.051 825.576,201.879 826.059,201.397 827.126,201.397 827.58,200.942 v1(827.58,199.692)
TDO: P3.5 U10.54 | length 26.6
  Top Layer w0.3: U10.54 824.205,217.297 824.408,217.5 v1(824.662,217.5) ; v1(826.58,199.683) P3.5
  Bottom Layer w0.3: v1(824.662,217.5) 824.662,216.027 823.062,214.427 823.062,201.803 824.103,200.762 826.364,200.762 826.58,200.545 v1(826.58,199.683)
TMS: P3.3 U10.56 | length 27
  Top Layer w0.3: U10.56 823.595,218.313 824.128,218.846 v1(824.662,218.846) ; v1(828.58,199.651) P3.3
  Bottom Layer w0.3: v1(824.662,218.846) 825.703,218.846 826.059,218.491 826.059,210.388 828.142,208.305 828.142,202.362 828.58,201.923 v1(828.58,199.651)
V_BT0: A0+.1 D2.1 R9.1 U1.1 U3.1 | length 45
  Top Layer w0.3: v1(826.135,226.847) 826.135,225.908 826.223,225.82 R9.1 827.507,224.409 827.989,223.926 831.444,223.926 833.069,222.301 835.228,222.301 835.894,221.635 D2.1
  Bottom Layer w0.3: U3.1 801.573,230.022 802.31,229.286 825.627,229.286 826.135,228.778 v1(826.135,226.847)
V_BT1: A1+.1 D7.1 R29.1 U1.5 U3.5 | length 36.7
  Top Layer w0.3: R29.1 831.52,225.12 833.653,222.987 835.431,222.987 837.957,220.461 D7.1
  Bottom Layer w0.3: U3.5 811.733,230.429 812.292,229.87 830.656,229.87 831.545,228.981 v1(831.545,225.044)
V_BT2: A2+.1 D8.1 R34.1 U1.9 U3.9 | length 30
  Top Layer w0.3: R34.1 835.533,224.053 837.616,221.971 839.572,221.971 840.44,221.102 D8.1
  Bottom Layer w0.3: U3.9 821.893,230.962 822.376,230.48 834.593,230.48 835.558,229.514 v1(835.558,224.917)
V_BT3: A3+.1 D9.1 R40.1 U1.13 U3.13 | length 22.1
  Top Layer w0.3: R40.1 839.546,223.615 D9.1
  Bottom Layer w0.3: U3.13 832.053,231.8 832.536,231.318 838.657,231.318 839.546,230.429 v1(839.546,224.866)
V_BT4: A4+.1 D10.1 R42.1 U1.17 V_IN.1 | length 47.9
  Top Layer w0.3: R42.1 843.559,221.939 D10.1
  Top Layer w1: V_IN.1 825.653,253.62 826.948,254.914 837.565,254.914 838.632,253.848 A4+.1
  Bottom Layer w0.3: U1.17 839.368,238.658 839.368,232.537 840.054,231.851 842.315,231.851 843.559,230.607 v1(843.559,224.917)
V_CHG: R1.2 U1.21 U2.5 U3.17 | length 1.9
  Top Layer w0.3: R1.2@849.112,248.402 U2.5
V_DISCHG: R2.2 U3.21 U4.4 | length 6.7
  Top Layer w0.3: U3.21 852.373,235.356 852.835,235.818 U4.4
V_GPS: P4.4 Q12.3 | length 13.6
  Top Layer w0.5: Q12.3 794.512,221.285 795.172,221.945 P4.4
VCC_2V8: C1.2 C2.2 C9.1 C11.1 C12.1 D3.1 D4.2 D5.2 D6.1 DS1.1 P1.1 P2.3 P2.4 Q1.2 Q10.2 Q11.2 Q12.2 R3.2 R30.1 R33.1 R35.2 R38.2 R44.2 R48.1 R49.1 R50.2 R52.2 R57.2 R67.2 U2.3 U4.3 U5.5 U6.5 U9.2 U10.1 U10.64 U15.3 U15.8 | length 268.8
  Top Layer w0.3: P1.1 v1(791.693,221.361) ; U10.64 818.972,222.301 818.388,222.885 818.388,225.857 820.076,227.545 C11.1 ; U15.3 833.399,193.802 833.78,193.421 834.847,193.421 v1(836.397,191.872) ; U6.5 854.283,218.943 ; U2.3 854.87,249.052 C1.2 855.816,248.932 856.056,248.691 856.056,236.728 ; Q1.2 856.57,215.818 854.38,218.008 854.38,219.71 854.888,220.218 856.259,220.218 856.652,220.611 R52.2 ; Q11.2@856.828,223.241 856.828,224.018 v1(856.259,224.587) 854.075,224.587 853.745,224.257 853.745,223.596 853.435,223.287 850.879,223.287 850.697,223.469 850.697,224.155 850.29,224.561 849.173,224.561 848.507,225.227 D6.1 850.353,226.3 851.078,227.025 851.078,235.991 851.764,236.677 857.809,236.677 858.668,235.818 859.617,235.818 860.03,236.232 C2.2
  Top Layer w0.5: Q12.2 795.462,207.706 794.995,207.239 v1(794.995,205.429) D4.2 794.346,198.947 796.239,197.053 805.332,197.053 806.464,198.184 R33.1 809.727,197.739 810.895,196.571 813.777,196.571 R50.2 ; P2.3 814.172,202.997 814.426,202.743 v1(817.931,202.743) ; R67.2 835.418,187.769 835.939,188.29 835.939,191.491 836.375,191.926 839.068,191.926 839.47,192.329 839.47,194.056 839.114,194.412 839.114,198.069 839.724,198.679 842.34,198.679 843.178,199.517 843.178,212.813 ; 835.457,186.168 843.063,186.168 845.376,188.482 R57.2 ; v1(836.397,191.872) v1@836.397,191.926 ; R35.2 843.178,212.813 ; R3.2 856.474,212.711 855.802,212.039 852.449,212.039 851.676,212.813 843.178,212.813 ; R3.2@856.651,214.095 Q1.2 ; R52.2@856.828,221.944 Q11.2@856.828,223.241
  Top Layer w1: 814.107,193.103 D3.1@819.051,193.103 ; P2.3 P2.4 ; R50.2@815.148,197.626 817.637,197.626 818.385,196.878 Q10.2 819.932,195.524 v1(819.181,194.772) D3.1
  Bottom Layer w0.3: v1(791.693,221.361) 791.693,206.324 792.588,205.429 v1(794.995,205.429)
  Bottom Layer w0.5: v1(818.744,222.326) 817.956,221.539 817.956,195.997 v1(819.181,194.772) 835.68,194.772 836.397,194.056 v1(836.397,191.872)
VCC_BAT: R2.1 U4.5 V.1 | length 10.5
  Top Layer w0.3: U4.5 857.946,235.168 858.063,235.052 858.063,230.759 R2.1@858.088,230.734 ; R2.1@858.037,229.946 V.1 ; R2.1@858.088,230.48 R2.1@858.622,229.946
VCC_CHARGE: R1.1 S+.1 U2.4 | length 8.4
  Top Layer w0.3: 843.737,250.495 850.468,250.495 851.011,249.952 U2.4
VCC_MNG: C5.1 D1.2 U14.5 U14.6 U14.8 VMNG.1 | length 11.5
  Top Layer w0.3: 846.277,198.063 846.42,198.206 U14.6@847.266,198.206 ; 846.491,197.206 U14.8@847.266,197.206 ; 850.431,198.37 850.431,202.705
  Bottom Layer w1: v1(846.277,198.806) v1(850.494,198.806) v1(851.281,199.593)
  other v1: 846.15,197.231 847.039,198.806
VCC_OUT: C22.1 R14.1 R57.1 U14.1 | length 18.8
  Top Layer w0.3: U14.1@850.353,196.119 850.353,193.384 851.052,192.684 851.052,191.694
  Top Layer w0.5: v1(845.491,193.089) R14.1@845.491,194.198 ; R57.1 849.325,189.687 850.849,191.211 C22.1@850.849,193.497
  Bottom Layer w0.3: v1(845.491,193.089) 845.491,194.235 846.379,195.123 v1(850.265,195.123)
VCC_TH: D2.2 D6.2 D7.2 D8.2 D9.2 D10.2 U1.20 U3.20 | length 44.1
  Top Layer w0.3: D2.2 D10.2@845.012,218.149 ; D10.2 845.402,218.175 846.201,218.973 846.201,223.444 847.319,224.561 847.319,229.921 845.947,231.292 845.947,237.82 846.557,238.43 849.325,238.43 849.859,238.963 U1.20 ; 847.319,228.371 847.533,228.586 D6.2
  Top Layer w0.5: D6.2@848.363,228.73 849.833,230.2 U3.20
WDT: U9.6 U10.59 | length 37.3
  Top Layer w0.3: U10.59 822.681,219.812 823.722,220.853 v1(825.398,220.853) ; U9.6 v1@840.384,202.971
  Bottom Layer w0.3: v1(825.398,220.853) 826.414,220.853 827.761,219.507 827.761,213.258 829.031,211.988 835.025,211.988 835.609,211.404 835.609,208.331 835.812,208.128 835.812,203.657 836.473,202.997 v1(840.359,202.997)
pads on no net: P1.0 P1.6 P2.23 P2.24 P3.0 U9.5 U10.7 U10.12 U10.27 U10.30 U10.31 U10.38

## Polygon pours and split planes (outlines as drawn)
GND on Top Layer (solid, remove dead copper): 784.377,263.881 866.623,263.881 866.623,180.924 784.022,180.924 784.022,264.058
VCC_MNG on Top Layer (solid, remove dead copper): 849.96,198.145 850.951,198.145 850.951,198.349 852.678,200.076 852.678,210.541 846.988,210.541 846.988,207.747 849.833,204.902 849.96,204.775
VCC_BAT on Top Layer (solid, remove dead copper): 857.047,231.953 863.905,231.953 863.905,227.94 856.996,227.94 856.996,231.953
V_DISCHG on Top Layer (solid, remove dead copper): 851.687,234.467 854.05,234.467 854.05,228.219 851.611,228.219 851.611,234.467
V_CHG on Top Layer (solid, remove dead copper): 847.852,249.555 850.036,249.555 850.036,246.151 850.57,245.618 852.627,245.618 853.542,244.704 853.542,240.64 851.408,240.64 851.408,242.9 851.002,243.307 848.512,243.307 847.928,243.891 847.852,243.967
VCC_CHARGE on Top Layer (solid, remove dead copper): 841.883,254.102 845.337,254.102 845.337,246.177 842.645,246.177 841.858,246.964 841.858,254.102
V_BT4 on Top Layer (solid, remove dead copper): 836.879,252.044 836.879,245.974 840.181,242.672 840.181,240.589 843.28,240.589 843.28,243.408 840.207,246.482 840.207,252.12 836.803,252.12
V_BT3 on Top Layer (solid, remove dead copper): 830.885,252.171 830.885,249.453 830.174,248.742 830.174,240.665 833.272,240.665 833.272,247.193 834.187,248.107 834.187,252.044 830.834,252.044
V_BT2 on Top Layer (solid, remove dead copper): 816.534,252.171 819.734,252.171 819.734,249.707 822.731,246.71 822.731,240.817 820.064,240.817 820.064,245.339 816.559,248.844
V_BT1 on Top Layer (solid, remove dead copper): 807.898,252.451 807.898,249.199 810.184,246.913 810.184,240.716 812.8,240.716 812.8,249.199 809.65,252.349 807.898,252.349
V_BT0 on Top Layer (solid, remove dead copper): 802.615,240.843 800.1,240.843 800.1,252.476 803.046,252.476 803.046,243.145 802.665,242.773 802.665,240.868
VCC_MNG on Top Layer (solid, remove dead copper): 847.446,196.963 847.446,198.984 847.215,199.199 845.976,199.199 845.976,197.017 847.446,197.017
VCC_OUT on Top Layer (solid, remove dead copper): 850.062,196.317 850.062,191.922 852.729,191.922 852.729,194.563 850.671,196.274 850.087,196.274
GND on Top Layer (solid, remove dead copper): 849.452,203.962 849.452,190.957 846.455,190.957 846.455,195.732 847.852,195.732 848.03,195.91 848.03,199.39 847.725,199.695 844.956,199.695 844.956,202.108 846.785,203.937 849.478,203.937
NetL2_2 on Top Layer (solid, remove dead copper): 855.828,196.901 851.281,196.901 851.154,196.774 851.154,196.647 852.881,194.92 855.777,194.92 855.777,196.901
NetL2_1 on Top Layer (solid, remove dead copper): 855.929,197.282 851.459,197.282 851.129,197.612 851.129,197.79 851.332,197.79 851.433,197.891 852.907,199.365 855.828,199.365 855.828,197.282
GND on Bottom Layer (solid, remove dead copper): 783.844,263.881 866.8,263.881 866.8,180.924 784.022,180.924 784.022,263.5
V_CHG on Bottom Layer (solid, remove dead copper): 840.664,232.894 840.664,238.481 841.832,239.649 850.824,239.649 851.408,240.233 851.408,242.545 853.77,242.545 853.77,239.065 852.932,238.227 852.627,237.922 843.864,237.922 843.178,237.236 843.178,232.816 840.664,232.816
V_BT3 on Bottom Layer (solid, remove dead copper): 830.555,242.341 833.095,242.341 833.095,232.664 830.605,232.664 830.605,242.418
V_BT2 on Bottom Layer (solid, remove dead copper): 820.445,242.341 822.935,242.341 822.935,232.74 820.395,232.74 820.395,242.316
V_BT1 on Bottom Layer (solid, remove dead copper): 810.209,242.138 812.8,242.138 812.8,232.766 810.209,232.766
V_BT0 on Bottom Layer (solid, remove dead copper): 800.049,242.265 802.665,242.265 802.665,232.639 800.075,232.639 800.075,242.24

## Keep-outs
Keep-Out Layer:
  the board outline again, w0.127

## Silkscreen, mask and mechanical layers (free items; w line width, h text height)
Top Overlay:
  rectangle: 818.388,253.559 834.568,256.972
  lines w0.127: 796.341,214.325 798.37,214.325 ; 798.37,212.347 798.37,214.325 ; 800.151,214.325 798.37,214.325 ; 832.383,210.185 834.314,210.185 834.288,212.039
  text "PN:3043-1-1532" at 815.873,259.41 h1
  text "Rev:3.20" at 815.823,257.556 h1
  text "SN:" at 815.924,255.194 h1
  text "G I C D V" at 791.794,228.321 h1 r270
Mechanical 1:
  circle w0.127: c801.837,208.432 r1.5
  circle w0.127: c837.028,204.679 r0.5
  circle w0.127: c834.488,204.679 r0.5
  circle w0.127: c816.708,204.679 r0.5
  circle w0.127: c819.248,204.679 r0.5
  circle w0.127: c821.788,204.679 r0.5
  circle w0.127: c824.328,204.679 r0.5
  circle w0.127: c826.868,204.679 r0.5
  circle w0.127: c829.408,204.679 r0.5
  circle w0.127: c831.948,204.679 r0.5
  circle w0.127: c831.948,207.219 r0.5
  circle w0.127: c829.408,207.219 r0.5
  circle w0.127: c826.868,207.219 r0.5
  circle w0.127: c824.328,207.219 r0.5
  circle w0.127: c821.788,207.219 r0.5
  circle w0.127: c819.248,207.219 r0.5
  circle w0.127: c816.708,207.219 r0.5
  circle w0.127: c814.168,204.679 r0.5
  circle w0.127: c814.168,207.219 r0.5
  circle w0.127: c834.488,207.219 r0.5
  circle w0.127: c837.028,207.219 r0.5
  circle w0.127: c849.469,208.431 r1.5
  circle w0.127: c825.653,249.681 r1.5
  circle w0.127: c825.653,249.681 r3
  circle w0.127: c801.837,208.432 r3
  circle w0.127: c849.469,208.432 r3
  lines w0.127: 812.898,203.409 812.898,208.439 838.298,208.439 838.298,203.409 812.898,203.409

## Text inside footprints (layer, text, board x,y; h text height)
P2: Top Overlay "1" at 809.092,204.165 h1.27; Top Overlay "2" at 809.092,206.705 h1.27; Top Overlay "23" at 841.096,204.165 h1.27; Top Overlay "24" at 841.096,206.705 h1.27
U1: Top Overlay "V1.00" at 802.64,243.307 h0.8
U3: Top Overlay "V1.00" at 802.615,235.306 h0.8